# Altium PCB ALTERA256.PcbDoc (part 1 of 4)
Units mil, origin at the board's own origin, x right, y up, seen from the top; angles counter-clockwise.
Board outline 3078.86 x 1897.76 mil, 4 copper layers (TOP, L2_G, L3_P, BOTTOM), stack 34.7 mil thick; 112 components, 168 nets, 693 pads, 318 vias.
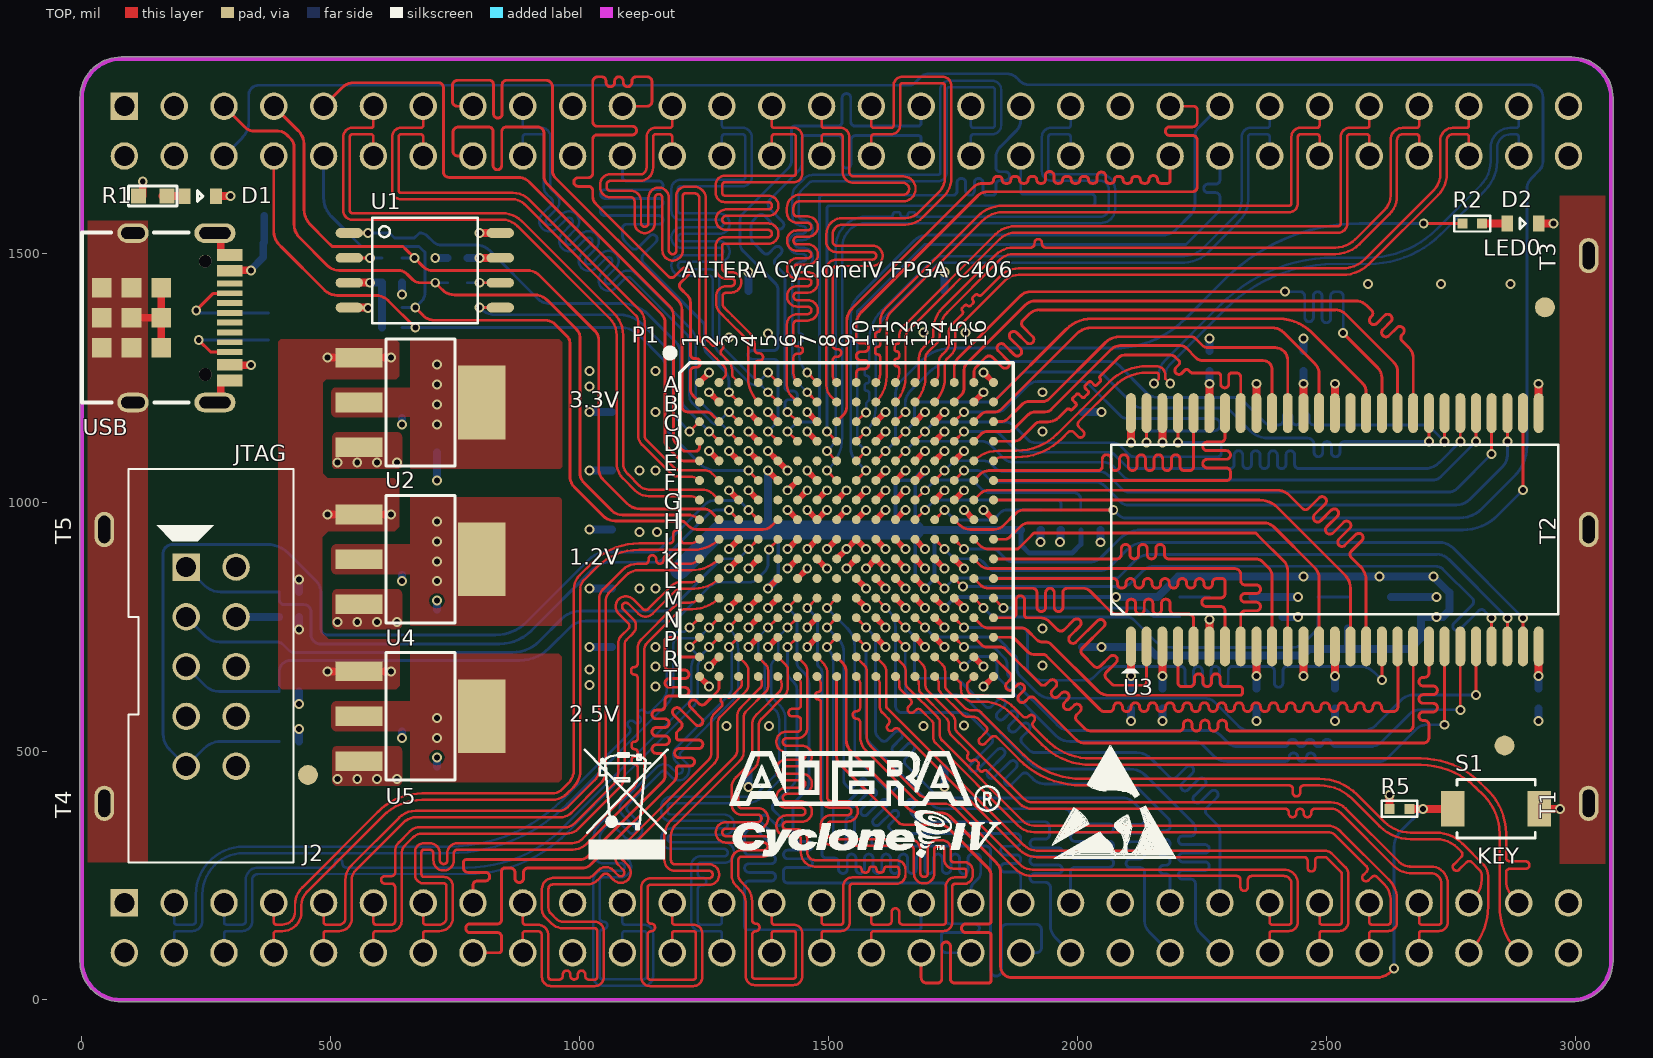
[diagram p0: TOP view]
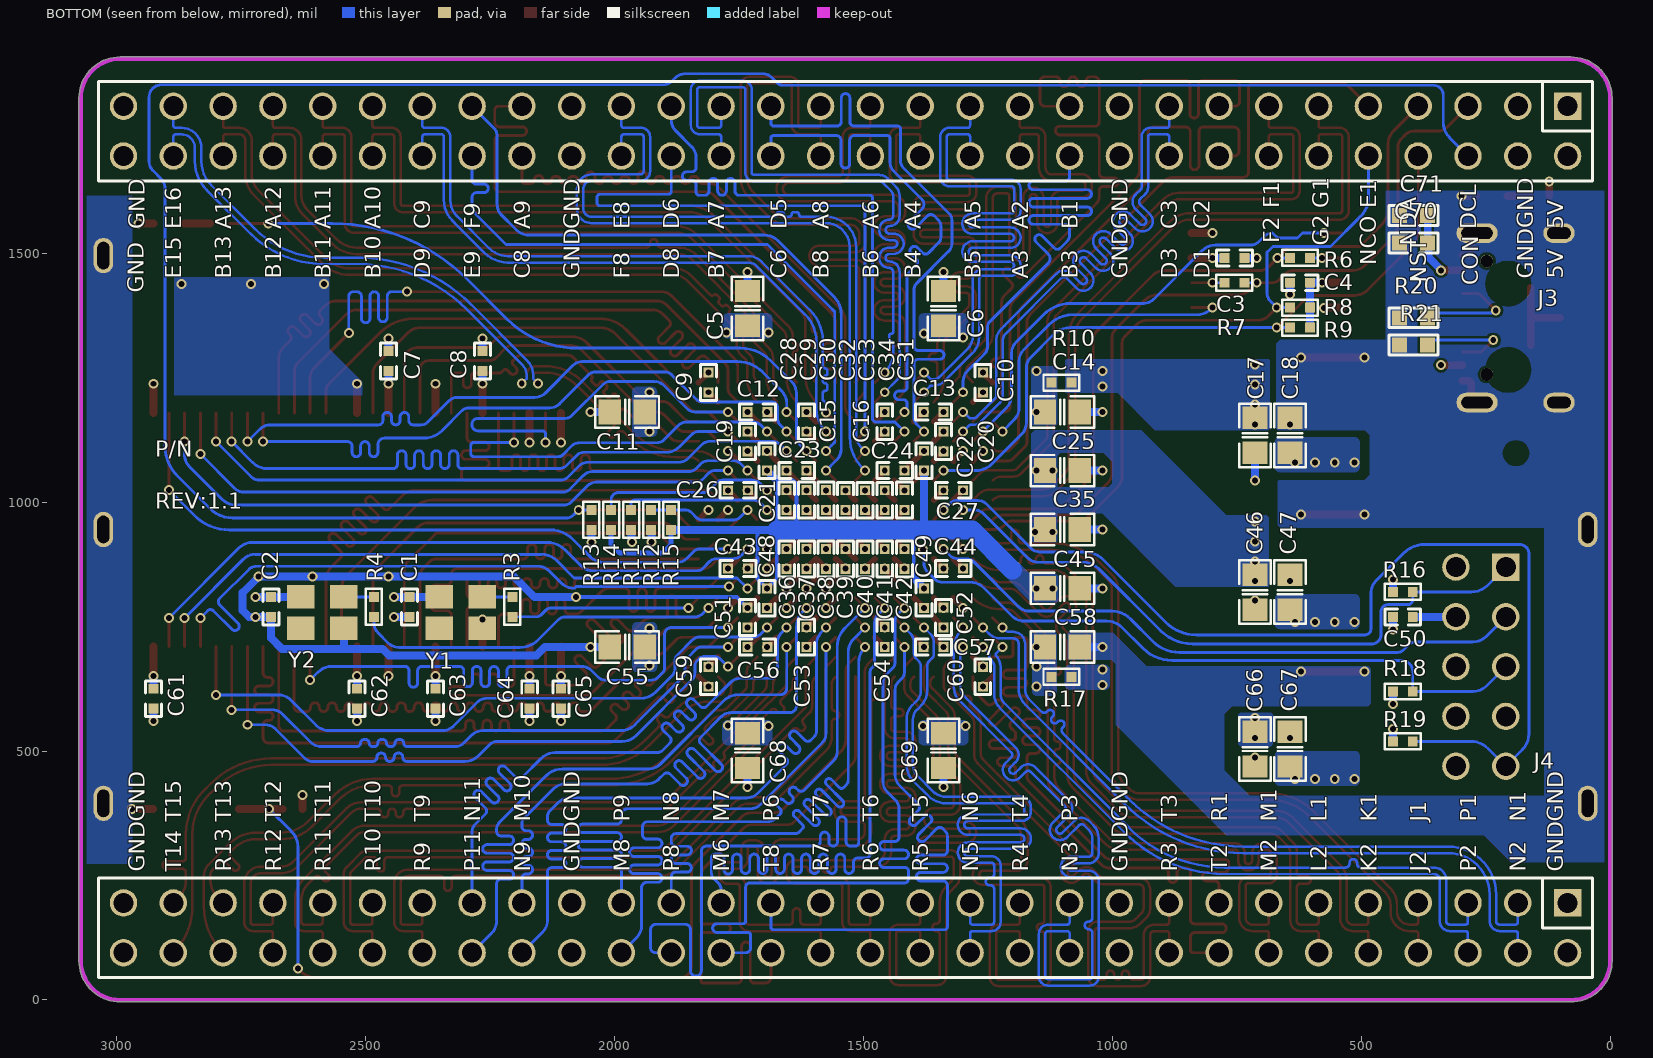
[diagram p1: BOTTOM view, seen from below]
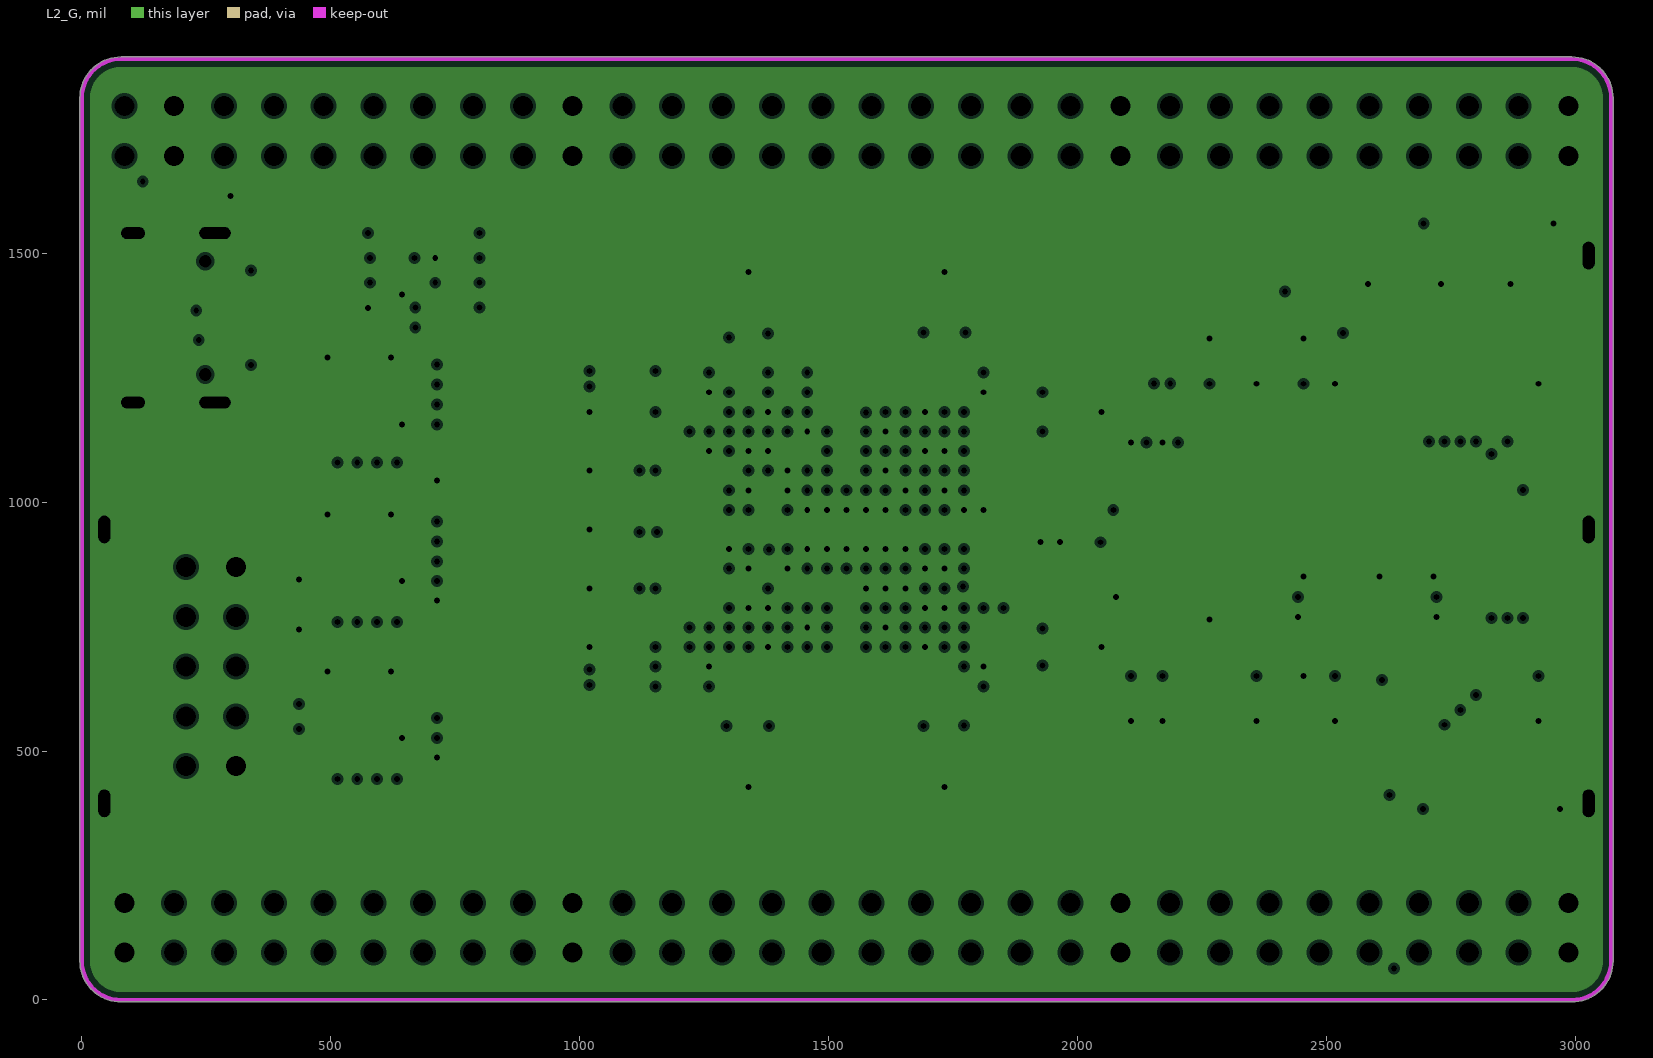
[diagram p2: L2_G, clearances drawn from the general rule]
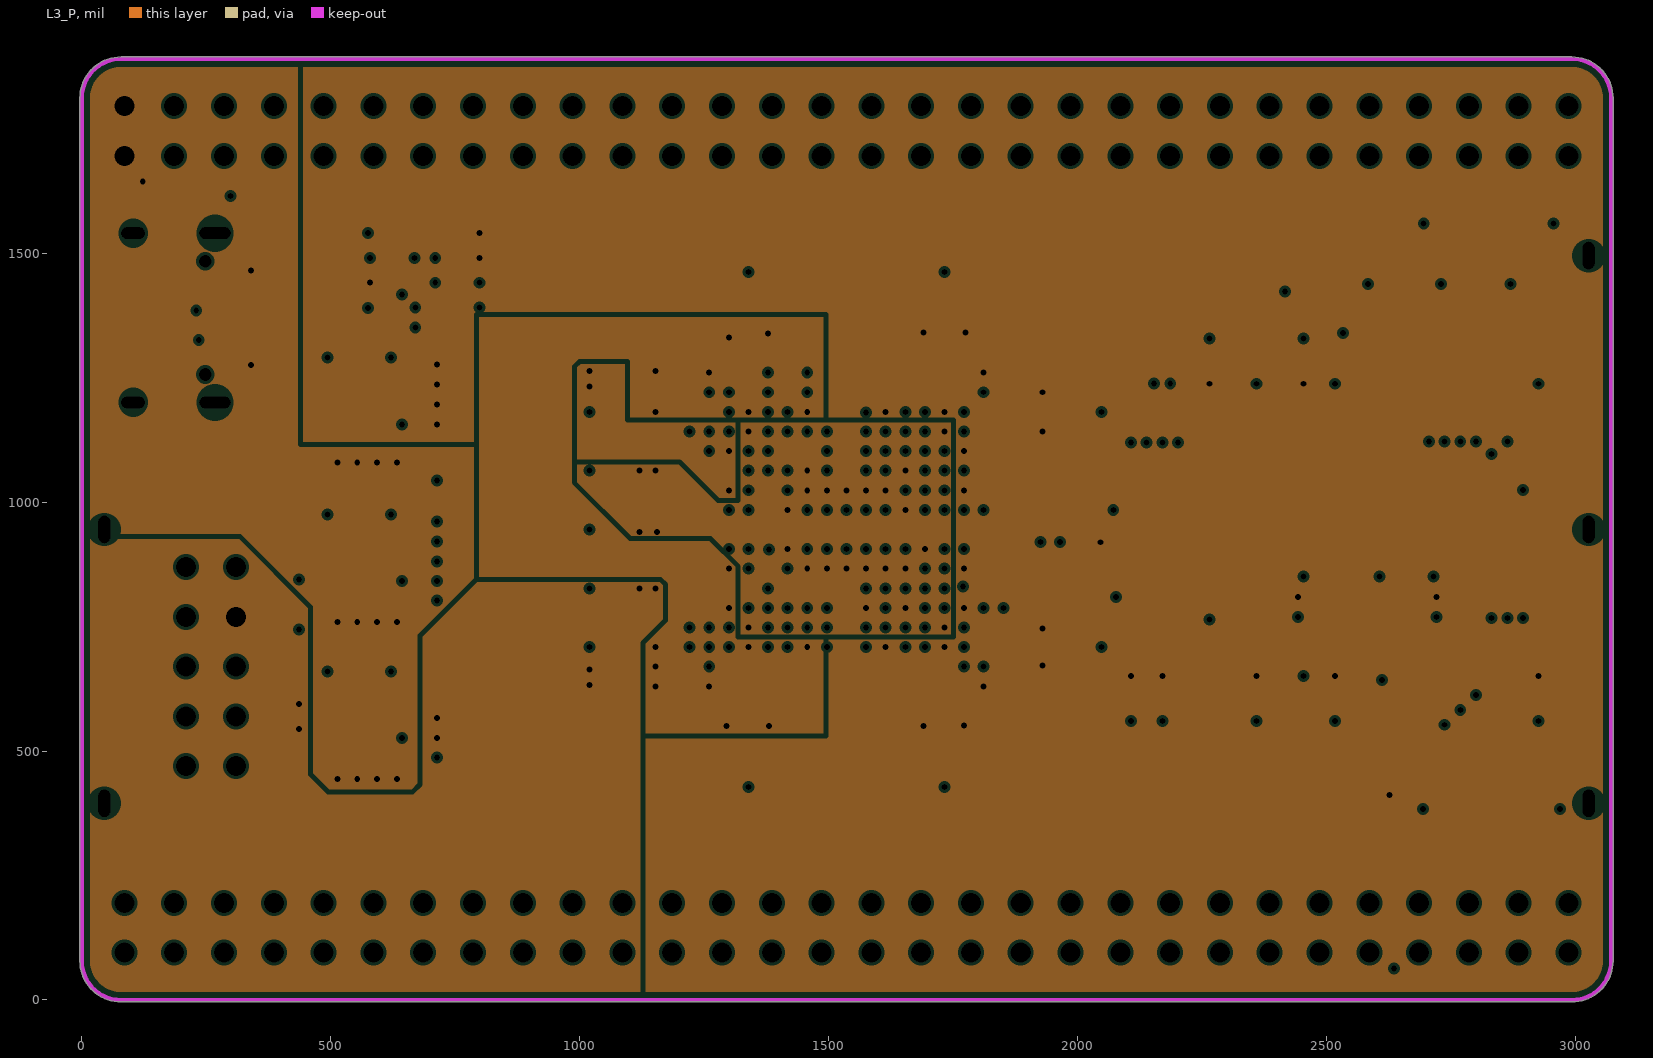
[diagram p3: L3_P, clearances drawn from the general rule]

## Layer stack, top to bottom
Top Solder: solder mask 0.4, Solder Resist, Dk 3.5
TOP: signal copper 1.38
Dielectric1: core 3.94, FR-4, Dk 4.5
L2_G: plane copper 1.4
Dielectric2: prepreg 12.6, FR-4, Dk 4.8
L3_P: plane copper 1.4
Dielectric3: core 12.6, FR-4, Dk 4.8
BOTTOM: signal copper 1.38
Bottom Solder: solder mask 0.4, Solder Resist, Dk 3.5

## Board outline
-3.7,78.74 ccw(c79.04,78.74) 79.04,-4 2992.42,-4 ccw(c2992.42,78.74) 3075.16,78.74 3075.16,1811.02 ccw(c2992.42,1811.02) 2992.42,1893.76 79.04,1893.76 ccw(c79.04,1811.02) -3.7,1811.02

## Design rules (kind name [scope] priority, off if disabled: settings)
Clearance [All] p1: gap=4.8 ignorepadtopadclearanceinfootprint=FALSE except(0: Arc-Hole Track-Hole SMDPad-Hole THPad-Hole Via-Hole Fill-Hole Poly-Hole Region-Hole Text-Hole)
ComponentClearance [All] p1 off: gap=10 collisioncheckmode=3 verticalgap=10 showdistances=FALSE
DiffPairsRouting [All] p1: maxlimit=10 minlimit=5 mostfreqgap=5 toplayer_minwidth=15 toplayer_maxwidth=15 toplayer_prefwidth=15 bottomlayer_minwidth=15 bottomlayer_maxwidth=15 bottomlayer_prefwidth=15 maxuncoupledlength=500
MinimumSolderMaskSliver [All] p1 off: minsoldermaskwidth=10
PlaneClearance [All] p1: clearance=6
PlaneConnect [All] p1: planeconnectstyle=Direct reliefexpansion=20 reliefentries=4 reliefconductorwidth=10 reliefairgap=10
PolygonConnect [All] p1: connectstyle=Direct reliefconductorwidth=10 reliefentries=4 polygonreliefangle="90 Angle" airgapwidth=10
RoutingVias [All] p1: holewidth=12 width=20 viastyle="Through Hole" minholewidth=8 minwidth=16 maxholewidth=160 maxwidth=320
SilkToSilkClearance [All] p1 off: silktosilkclearance=10
SilkToSolderMaskClearance SilkscreenOverComponentPads [IsPad] p1 off: minsilkscreentomaskgap=10 clearancetoexposedcopper=TRUE
SolderMaskExpansion [All] p1: expansion=4 istentingtop=FALSE
Width [All] p1: maxlimit=80 minlimit=4.8 preferedwidth=5
23 further rules are at their usual default settings.

## Classes and differential pairs
component class "PAGE03 FPGA IO": R8 R9 R13
component class "PAGE04 FPGA CLOCK": C1 C2 R3 R4 Y1 Y2
component class "PAGE05 FPGA Config": C3 C4 C50 D2 J2 R2 R5 R6 R7 R11 R12 R14 R15 R16 R18 R19 S1 U1
component class "PAGE06 FPGA Power": C5 C6 C9 C10 C11 C12 C13 C14 C15 C16 C19 C20 C21 C22 C23 C24 C25 C26 C27 C28 C29 C30 C31 C32 C33 C34 C35 C36 C37 C38 C39 C40 C41 C42 C43 C44 C45 C48 C49 C51 C52 C53 C54 C55 C56 C57 C58 C59 C60 C68 C69 P1 R10 R17
component class "PAGE07 SDRAM": C7 C8 C61 C62 C63 C64 C65 U3
component class "PAGE08 System Power": C17 C18 C46 C47 C66 C67 C70 C71 D1 R1 R20 R21 U2 U4 U5 USB
component class "PAGE09 Connectors": J3 J4 T1 T2 T3 T4 T5
net class SDRAM_A[12..0]: SDRAM_A0 SDRAM_A1 SDRAM_A2 SDRAM_A3 SDRAM_A4 SDRAM_A5 SDRAM_A6 SDRAM_A7 SDRAM_A8 SDRAM_A9 SDRAM_A10 SDRAM_A11 SDRAM_A12
net class SDRAM_DQ[15..0]: SDRAM_DQ0 SDRAM_DQ1 SDRAM_DQ2 SDRAM_DQ3 SDRAM_DQ4 SDRAM_DQ5 SDRAM_DQ6 SDRAM_DQ7 SDRAM_DQ8 SDRAM_DQ9 SDRAM_DQ10 SDRAM_DQ11 SDRAM_DQ12 SDRAM_DQ13 SDRAM_DQ14 SDRAM_DQ15

## Components (designator, comment, footprint, x,y, rotation, side; value= is the part's Value field where it differs from the comment)
C1 "100nF" C0402 2411.61,789.5 r90 bottom locked
C2 "100nF" C0402 2689.61,789.5 r90 bottom locked
C3 "100nF" C0402 754.95,1490.39 r0 bottom locked
C4 "100nF" C0402 623,1440.39 r180 bottom locked
C5 "10uF" C0805 1732.59,1388.83 r270 bottom locked
C6 "10uF" C0805 1338.89,1388.83 r270 bottom locked
C7 "100nF" C0402 2453.43,1283.54 r270 bottom locked
C8 "100nF" C0402 2264.45,1283.54 r270 bottom locked
C9 "100nF" C0402 1811.34,1240 r90 bottom locked
C10 "100nF" C0402 1260.14,1240 r90 bottom locked
C11 "10uF" C0805 1974.15,1181.09 r180 bottom locked
C12 "100nF" C0402 1712.59,1181.09 r0 bottom locked
C13 "100nF" C0402 1358.89,1181.09 r180 bottom locked
C14 "10uF" C0805 1100.3,1181.09 r0 bottom locked
C15 "100nF" C0402 1614.48,1161.09 r90 bottom locked
C16 "100nF" C0402 1457,1161.09 r90 bottom locked
C17 "22uF/6.3V" C0805 713.3,1133.99 r90 bottom locked
C18 "10uF/10V" C0805 643.3,1133.99 r270 bottom locked
C19 "100nF" C0402 1732.59,1121.72 r90 bottom locked
C20 "100nF" C0402 1338.89,1121.72 r90 bottom locked
C21 "100nF" C0402 1693.22,1082.98 r270 bottom locked
C22 "100nF" C0402 1378.26,1082.98 r270 bottom locked
C23 "100nF" C0402 1633.85,1062.98 r0 bottom locked
C24 "100nF" C0402 1437,1062.98 r0 bottom locked
C25 "10uF" C0805 1100.3,1062.98 r0 bottom locked
C26 "100nF" C0402 1751.96,1023.61 r0 bottom locked
C27 "100nF" C0402 1319.52,1023.61 r180 bottom locked
C28 "100nF" C0402 1653.85,1004.24 r270 bottom locked
C29 "100nF" C0402 1614.48,1004.24 r90 bottom locked
C30 "100nF" C0402 1575.11,1004.24 r90 bottom locked
C31 "100nF" C0402 1417.63,1004.24 r270 bottom locked
C32 "100nF" C0402 1535.73,1003.61 r90 bottom locked
C33 "100nF" C0402 1496.37,1003.61 r90 bottom locked
C34 "100nF" C0402 1457,1003.61 r90 bottom locked
C35 "10uF" C0805 1100.3,944.86 r0 bottom locked
C36 "100nF" C0402 1653.85,885.5 r270 bottom locked
C37 "100nF" C0402 1614.48,885.5 r270 bottom locked
C38 "100nF" C0402 1575.11,885.5 r270 bottom locked
C39 "100nF" C0402 1535.73,885.5 r270 bottom locked
C40 "100nF" C0402 1496.37,885.5 r270 bottom locked
C41 "100nF" C0402 1457,885.5 r270 bottom locked
C42 "100nF" C0402 1417.63,885.5 r90 bottom locked
C43 "100nF" C0402 1751.96,866.13 r0 bottom locked
C44 "100nF" C0402 1319.52,866.13 r180 bottom locked
C45 "10uF" C0805 1100.3,826.76 r0 bottom locked
C46 "22uF/6.3V" C0805 713.3,818.99 r90 bottom locked
C47 "10uF/10V" C0805 643.3,818.99 r270 bottom locked
C48 "100nF" C0402 1693.22,806.76 r90 bottom locked
C49 "100nF" C0402 1378.26,806.76 r90 bottom locked
C50 "100nF" C0402 416.7,769.45 r180 bottom locked
C51 "100nF" C0402 1732.59,768.02 r270 bottom locked
C52 "100nF" C0402 1338.89,768.02 r270 bottom locked
C53 "100nF" C0402 1614.48,728.65 r270 bottom locked
C54 "100nF" C0402 1457,728.65 r270 bottom locked
C55 "10uF" C0805 1974.15,708.65 r180 bottom locked
C56 "100nF" C0402 1712.59,708.65 r0 bottom locked
C57 "100nF" C0402 1358.89,708.65 r180 bottom locked
C58 "10uF" C0805 1100.3,708.65 r0 bottom locked
C59 "100nF" C0402 1811.33,649 r270 bottom locked
C60 "100nF" C0402 1260.15,649 r270 bottom locked
C61 "100nF" C0402 2925.87,605.04 r90 bottom locked
C62 "100nF" C0402 2516.42,605.04 r90 bottom locked
C63 "100nF" C0402 2358.94,605.04 r90 bottom locked
C64 "100nF" C0402 2169.96,605.04 r90 bottom locked
C65 "100nF" C0402 2106.97,605.04 r90 bottom locked
C66 "22uF/6.3V" C0805 713.3,503.99 r90 bottom locked
C67 "10uF/10V" C0805 643.3,503.99 r270 bottom locked
C68 "10uF" C0805 1732.59,500.91 r90 bottom locked
C69 "10uF" C0805 1338.89,500.91 r90 bottom locked
C70 "104" "C 0603" 395,1520 r0 bottom
C71 "10uF" "C 0603" 395,1575 r0 bottom
D1 "GREEN" Q0603 238.13,1614.28 r0 top locked
D2 "GREEN" Q0603 2894.37,1559.28 r0 top locked
J2 "CONN RCPT 5x2/SM" DIP10-2P54-I 261.07,670.63 r270 top locked
J3 "CONN PLUG 30x2" DIP2X30_2P54 1534.73,1744.88 r180 bottom locked
J4 "CONN PLUG 30x2" DIP2X30_2P54 1534.73,144.88 r180 bottom locked
P1 "EP4CE22F256" fbga256_opt1 1537.82,945.46 r0 top locked
R1 "680R" "R 0603" 142.6,1614.23 r0 top locked
R2 "1K" R0402#1 2792.37,1559.33 r180 top locked
R3 "33R" R0402#2 2204.94,789.55 r270 bottom locked
R4 "33R" R0402#2 2482.94,789.55 r270 bottom locked
R5 "1K" R0402#1 2646.33,383.94 r0 top locked
R6 "33R" R0402#2 622.95,1490.34 r0 bottom locked
R7 "33R" R0402#2 754.9,1440.34 r0 bottom locked
R8 "10K" R0402#2 622.95,1390.34 r0 bottom locked
R9 "10K" R0402#2 622.95,1350.34 r0 bottom locked
R10 "0R" R0402#2 1102.15,1239.73 r0 bottom locked
R11 "1K" R0402#2 1966.25,964.29 r270 bottom locked
R12 "1K/NC" R0402#2 1926.25,964.29 r270 bottom locked
R13 "10K" R0402#2 2046.35,964.19 r90 bottom locked
R14 "1K" R0402#2 2006.35,964.19 r90 bottom locked
R15 "1K" R0402#2 1886.35,964.19 r90 bottom locked
R16 "1K" R0402#2 416.75,819.5 r180 bottom locked
R17 "0R/NC" R0402#2 1102.15,648.99 r0 bottom locked
R18 "1K" R0402#2 416.65,619.4 r0 bottom locked
R19 "1K" R0402#2 416.65,519.4 r0 bottom locked
R20 "5.1K" "R 0603" 395,1370 r0 bottom
R21 "5.1K" "R 0603" 395,1315 r0 bottom
S1 "FSMRA2JH" SMD_3X4X2MM 2840.28,383.99 r0 top locked
T1 "TPAD_015" TP_OBL1_4X0_6 3026.16,394.88 r90 top locked
T2 "TPAD_015" TP_OBL1_4X0_6 3026.16,944.88 r90 top locked
T3 "TPAD_015" TP_OBL1_4X0_6 3026.16,1494.88 r90 top locked
T4 "TPAD_015" TP_OBL1_4X0_6 45.3,394.88 r90 top locked
T5 "TPAD_015" TP_OBL1_4X0_6 45.3,944.88 r90 top locked
U1 "W25Q16FVSIG" SOIC8_1P27_208MIL 688.95,1465.39 r0 top locked
U2 "AMS1117-3.3" SOT-223 680.3,1199.86 r270 top locked
U3 "H57V2562GTR-75C" TSOP54-400 2516.42,938.78 r0 top
U4 "AMS1117-1.2" SOT-223 680.3,884.86 r270 top locked
U5 "AMS1117-2.5" SOT-223 680.3,569.86 r270 top locked
USB "USB TypeC" USB2.0-TYPE-C-16P 296.95,1495.98 r270 top (schematic designator USB1)
Y1 "50MHz" OSC3225 2308.3,772.78 r0 bottom locked
Y2 "TBD" OSC3225 2586.3,772.78 r0 bottom locked

## Footprints (in the part's own frame and the unit in brackets; to place one, negate y for a bottom-side part, rotate by r counter-clockwise, add the part's x,y. Pads: shape width x height; smd on the part's side, far side on the other; paste and mask are expansions set on the pad)
C0402 [mil] "C0402"
  rect 20x20 smd: 1(20,0) 2(-20,0)
  silkscreen extent -36,-16 36,16
C0805 [mil] "C0805"
  rect 44.9x50 smd: 1(35,0) 2(-35,0)
  silkscreen extent -64,-32 64,32
"C 0603" [mil]
  rect 30x30 smd mask+2: 1(-28.25,0) 2(28.25,0)
  silkscreen extent -49,-20 49,20
DIP2X30_2P54 [mil] "DIP2X30_2P54"
  rect 55.1x55.1 hole 40.2: 1(1449,50)
  round 55.1 hole 40.2: 2(1449,-50) 3(1349,50) 4(1349,-50) 5(1249,50) 6(1249,-50) 7(1149,50) 8(1149,-50) 9(1049,50) 10(1049,-50) 11(949,50) 12(949,-50) 13(849,50) 14(849,-50) 15(749,50) 16(749,-50) 17(649,50) 18(649,-50) 19(549,50) 20(549,-50) 21(449,50) 22(449,-50) 23(349,50) 24(349,-50) 25(249,50) 26(249,-50) 27(149,50) 28(149,-50) 29(49,50) 30(49,-50) 31(-51,50) 32(-51,-50) 33(-151,50) 34(-151,-50) 35(-251,50) 36(-251,-50) 37(-351,50) 38(-351,-50) 39(-451,50) 40(-451,-50) 41(-551,50) 42(-551,-50) 43(-651,50) 44(-651,-50) 45(-751,50) 46(-751,-50) 47(-851,50) 48(-851,-50) 49(-951,50) 50(-951,-50) 51(-1051,50) 52(-1051,-50) 53(-1151,50) 54(-1151,-50) 55(-1251,50) 56(-1251,-50) 57(-1351,50) 58(-1351,-50) 59(-1451,50) 60(-1451,-50)
  silkscreen extent -1501,-100 1499,100
DIP10-2P54-I [mil] "DIP10-2P54-I"
  rect 55.1x55.1 hole 40.2: 1(-198.82,-51.18)
  round 55.1 hole 40.2: 2(-198.82,48.82) 3(-98.82,-51.18) 4(-98.82,48.82) 5(1.18,-51.18) 6(1.18,48.82) 7(101.18,-51.18) 8(101.18,48.82) 9(201.18,-51.18) 10(201.18,48.82)
  silkscreen extent -396,-167 394,165
fbga256_opt1 [mil] "FBGA256_OPT1"
  round 18 smd: A1(-297.36,294.69) A2(-257.99,294.69) A3(-218.62,294.69) A4(-179.25,294.69) A5(-139.88,294.69) A6(-100.51,294.69) A7(-61.14,294.69) A8(-21.77,294.69) A9(17.61,294.69) A10(56.98,294.69) A11(96.35,294.69) A12(135.72,294.69) A13(175.09,294.69) A14(214.46,294.69) A15(253.83,294.69) A16(293.2,294.69) B1(-297.36,255.32) B2(-257.99,255.32) B3(-218.62,255.32) B4(-179.25,255.32) B5(-139.88,255.32) B6(-100.51,255.32) B7(-61.14,255.32) B8(-21.77,255.32) B9(17.61,255.32) B10(56.98,255.32) B11(96.35,255.32) B12(135.72,255.32) B13(175.09,255.32) B14(214.46,255.32) B15(253.83,255.32) B16(293.2,255.32) C1(-297.36,215.95) C2(-257.99,215.95) C3(-218.62,215.95) C4(-179.25,215.95) C5(-139.88,215.95) C6(-100.51,215.95) C7(-61.14,215.95) C8(-21.77,215.95) C9(17.61,215.95) C10(56.98,215.95) C11(96.35,215.95) C12(135.72,215.95) C13(175.09,215.95) C14(214.46,215.95) C15(253.83,215.95) C16(293.2,215.95) D1(-297.36,176.58) D2(-257.99,176.58) D3(-218.62,176.58) D4(-179.25,176.58) D5(-139.88,176.58) D6(-100.51,176.58) D7(-61.14,176.58) D8(-21.77,176.58) D9(17.61,176.58) D10(56.98,176.58) D11(96.35,176.58) D12(135.72,176.58) D13(175.09,176.58) D14(214.46,176.58) D15(253.83,176.58) D16(293.2,176.58) E1(-297.36,137.21) E2(-257.99,137.21) E3(-218.62,137.21) E4(-179.25,137.21) E5(-139.88,137.21) E6(-100.51,137.21) E7(-61.14,137.21) E8(-21.77,137.21) E9(17.61,137.21) E10(56.98,137.21) E11(96.35,137.21) E12(135.72,137.21) E13(175.09,137.21) E14(214.46,137.21) E15(253.83,137.21) E16(293.2,137.21) F1(-297.36,97.84) F2(-257.99,97.84) F3(-218.62,97.84) F4(-179.25,97.84) F5(-139.88,97.84) F6(-100.51,97.84) F7(-61.14,97.84) F8(-21.77,97.84) F9(17.61,97.84) F10(56.98,97.84) F11(96.35,97.84) F12(135.72,97.84) F13(175.09,97.84) F14(214.46,97.84) F15(253.83,97.84) F16(293.2,97.84) G1(-297.36,58.47) G2(-257.99,58.47) G3(-218.62,58.47) G4(-179.25,58.47) G5(-139.88,58.47) G6(-100.51,58.47) G7(-61.14,58.47) G8(-21.77,58.47) G9(17.61,58.47) G10(56.98,58.47) G11(96.35,58.47) G12(135.72,58.47) G13(175.09,58.47) G14(214.46,58.47) G15(253.83,58.47) G16(293.2,58.47) H1(-297.36,19.1) H2(-257.99,19.1) H3(-218.62,19.1) H4(-179.25,19.1) H5(-139.88,19.1) H6(-100.51,19.1) H7(-61.14,19.1) H8(-21.77,19.1) H9(17.61,19.1) H10(56.98,19.1) H11(96.35,19.1) H12(135.72,19.1) H13(175.09,19.1) H14(214.46,19.1) H15(253.83,19.1) H16(293.2,19.1) J1(-297.36,-20.28) J2(-257.99,-20.28) J3(-218.62,-20.28) J4(-179.25,-20.28) J5(-139.88,-20.28) J6(-100.51,-20.28) J7(-61.14,-20.28) J8(-21.77,-20.28) J9(17.61,-20.28) J10(56.98,-20.28) J11(96.35,-20.28) J12(135.72,-20.28) J13(175.09,-20.28) J14(214.46,-20.28) J15(253.83,-20.28) J16(293.2,-20.28) K1(-297.36,-59.65) K2(-257.99,-59.65) K3(-218.62,-59.65) K4(-179.25,-59.65) K5(-139.88,-59.65) K6(-100.51,-59.65) K7(-61.14,-59.65) K8(-21.77,-59.65) K9(17.61,-59.65) K10(56.98,-59.65) K11(96.35,-59.65) K12(135.72,-59.65) K13(175.09,-59.65) K14(214.46,-59.65) K15(253.83,-59.65) K16(293.2,-59.65) L1(-297.36,-99.02) L2(-257.99,-99.02) L3(-218.62,-99.02) L4(-179.25,-99.02) L5(-139.88,-99.02) L6(-100.51,-99.02) L7(-61.14,-99.02) L8(-21.77,-99.02) L9(17.61,-99.02) L10(56.98,-99.02) L11(96.35,-99.02) L12(135.72,-99.02) L13(175.09,-99.02) L14(214.46,-99.02) L15(253.83,-99.02) L16(293.2,-99.02) M1(-297.36,-138.39) M2(-257.99,-138.39) M3(-218.62,-138.39) M4(-179.25,-138.39) M5(-139.88,-138.39) M6(-100.51,-138.39) M7(-61.14,-138.39) M8(-21.77,-138.39) M9(17.61,-138.39) M10(56.98,-138.39) M11(96.35,-138.39) M12(135.72,-138.39) M13(175.09,-138.39) M14(214.46,-138.39) M15(253.83,-138.39) M16(293.2,-138.39) N1(-297.36,-177.76) N2(-257.99,-177.76) N3(-218.62,-177.76) N4(-179.25,-177.76) N5(-139.88,-177.76) N6(-100.51,-177.76) N7(-61.14,-177.76) N8(-21.77,-177.76) N9(17.61,-177.76) N10(56.98,-177.76) N11(96.35,-177.76) N12(135.72,-177.76) N13(175.09,-177.76) N14(214.46,-177.76) N15(253.83,-177.76) N16(293.2,-177.76) P1(-297.36,-217.13) P2(-257.99,-217.13) P3(-218.62,-217.13) P4(-179.25,-217.13) P5(-139.88,-217.13) P6(-100.51,-217.13) P7(-61.14,-217.13) P8(-21.77,-217.13) P9(17.61,-217.13) P10(56.98,-217.13) P11(96.35,-217.13) P12(135.72,-217.13) P13(175.09,-217.13) P14(214.46,-217.13) P15(253.83,-217.13) P16(293.2,-217.13) R1(-297.36,-256.5) R2(-257.99,-256.5) R3(-218.62,-256.5) R4(-179.25,-256.5) R5(-139.88,-256.5) R6(-100.51,-256.5) R7(-61.14,-256.5) R8(-21.77,-256.5) R9(17.61,-256.5) R10(56.98,-256.5) R11(96.35,-256.5) R12(135.72,-256.5) R13(175.09,-256.5) R14(214.46,-256.5) R15(253.83,-256.5) R16(293.2,-256.5) T1(-297.36,-295.87) T2(-257.99,-295.87) T3(-218.62,-295.87) T4(-179.25,-295.87) T5(-139.88,-295.87) T6(-100.51,-295.87) T7(-61.14,-295.87) T8(-21.77,-295.87) T9(17.61,-295.87) T10(56.98,-295.87) T11(96.35,-295.87) T12(135.72,-295.87) T13(175.09,-295.87) T14(214.46,-295.87) T15(253.83,-295.87) T16(293.2,-295.87)
  silkscreen extent -364,-335 333,361
OSC3225 [mil] "OSC3225"
  rect 55.12x47.24 smd: 1(43.31,26.28) 2(-43.31,26.28) 3(-43.31,-36.72) 4(43.31,-36.72)
  silkscreen extent 31,54 59,62
Q0603 [mil] "Q0603"
  rect 23.62x31.5 smd: 1(-31.5,0) 2(31.5,0)
  silkscreen extent -6,-11 5,11
R0402#1 [mil] "R0402"
  rect 20x20 smd: 1(-20.05,0.05) 2(19.95,0.05)
  silkscreen extent -36,-16 36,16
R0402#2 [mil] "R0402"
  rect 20x20 smd: 1(20.05,-0.05) 2(-19.95,-0.05)
  silkscreen extent -36,-16 36,16
"R 0603" [mil]
  rect 30x30 smd mask+2: 1(-28.25,0) 2(28.25,0)
  silkscreen extent -49,-20 49,20
SMD_3X4X2MM [mil] "SMD_3X4X2MM"
  rect 47.24x70.87 smd: 1(-86.61,0) 2(86.61,0)
  silkscreen extent -79,-59 79,59
SOIC8_1P27_208MIL [mil] "SOIC8_1P27_208MIL"
  oval 55.12x19.68 smd: 1(-151.57,75) 2(-151.57,25) 3(-151.57,-25) 4(-151.57,-75) 5(151.57,-75) 6(151.57,-25) 7(151.57,25) 8(151.57,75)
  silkscreen extent -106,-106 106,106
SOT-223 [mm] "SOT-223"
  rect 1x2.4 smd: 1(-2.29,-3.125) 2(0,-3.125) 3(2.29,-3.125)
  rect 3.75x2.4 smd: 4(0,3.125)
  silkscreen extent -3.25,-1.75 3.25,1.75
TP_OBL1_4X0_6 [mil] "TP_OBL1_4X0_6"
  oval 70.87x39.37 hole 24 slot 55 at 0 deg: 1(0,0)
TSOP54-400 [mil] "TSOP54-400"
  oval 20x80 smd: 1(-409.45,-228.74) 2(-377.95,-228.74) 3(-346.46,-228.74) 4(-314.96,-228.74) 5(-283.47,-228.74) 6(-251.97,-228.74) 7(-220.47,-228.74) 8(-188.98,-228.74) 9(-157.48,-228.74) 10(-125.99,-228.74) 11(-94.49,-228.74) 12(-62.99,-228.74) 13(-31.5,-228.74) 14(0,-228.74) 15(31.49,-228.74) 16(62.99,-228.74) 17(94.49,-228.74) 18(125.98,-228.74) 19(157.48,-228.74) 20(188.98,-228.74) 21(220.47,-228.74) 22(251.97,-228.74) 23(283.46,-228.74) 24(314.96,-228.74) 25(346.46,-228.74) 26(377.95,-228.74) 27(409.45,-228.74) 28(409.45,239.76) 29(377.95,239.76) 30(346.46,239.76) 31(314.96,239.76) 32(283.46,239.76) 33(251.97,239.76) 34(220.47,239.76) 35(188.98,239.76) 36(157.48,239.76) 37(125.98,239.76) 38(94.49,239.76) 39(62.99,239.76) 40(31.49,239.76) 41(0,239.76) 42(-31.5,239.76) 43(-62.99,239.76) 44(-94.49,239.76) 45(-125.99,239.76) 46(-157.48,239.76) 47(-188.98,239.76) 48(-220.47,239.76) 49(-251.97,239.76) 50(-283.47,239.76) 51(-314.96,239.76) 52(-346.46,239.76) 53(-377.95,239.76) 54(-409.45,239.76)
  silkscreen extent -449,-282 449,176
USB2.0-TYPE-C-16P [mm]
  rect 0.6x1.3 smd mask+0.064: 1(0,0) 2(0.8,0) 11(5.6,0) 12(6.4,0)
  rect 0.3x1.3 smd mask+0.064: 3(1.45,0) 4(1.95,0) 5(2.45,0) 6(2.95,0) 7(3.45,0) 8(3.95,0) 9(4.45,0) 10(4.95,0)
  oval 1x2.1 hole 0.6 slot 1.6 at 90 deg: SH1(-1.12,-0.745) SH3(7.52,-0.745)
  oval 1x1.6 hole 0.6 slot 1.2 at 90 deg: SH2(-1.12,-4.925) SH4(7.52,-4.925)
  rect 1x1 smd mask+0: SH2(1.676,-3.478) SH2(1.676,-6.526) SH2(1.676,-5.002) SH2(3.2,-3.478) SH2(3.2,-6.526) SH2(3.2,-5.002) SH2(4.724,-6.526)
  rect 1x1 smd paste+0 mask+0: SH2(4.724,-5.002) SH2(4.724,-3.478)
  round 0.65 hole 0.65 unplated mask+0: ""(0.31,-1.245) ""(6.09,-1.245)
  silkscreen extent -1.14,-7.53 7.52,-2.09

## Part data
C1 C2 C3 C4 C50: library part CAP_0, "CAP CER .1UF 16V X7R 0402", DIELECTRIC=X7R, Manufacturer=MURATA, MANUFACTURER P/N=GRM155R71C104KA88D, DISTRIBUTOR=DIGIKEY, DISTRIBUTOR P/N=490-3261-1-ND, PRICE=0.00300, ROOM=PHY&FPGA
C5 C6 C11 C14 C17 C25 C35 C45 C46 C55 C58 C66 C68 C69: library part CAP_NP, "Capacitor, 10u, 0805, X6S, 10%, 10V", Tolerance=10%, AGILE_PN=150-75429, CAD_APPROVED=Yes, FPLIST=CC0201,CC0201_HD,CC0201_3PIN,0201_CC, HEIGHT=0.33MM, MFG_NAME01=MURATA, MFG_PN01=GRM31CR71A106KA01L, RoHS=Yes
C7 C8 C9 C10 C12 C13 C15 C16 C19 C20 C21 C22 C23 C24 C26 C27 C28 C29 C30 C31 C32 C33 C34 C36 C37 C38 C39 C40 C41 C42 C43 C44 C48 C49 C51 C52 C53 C54 C56 C57 C59 C60 C61 C62 C63 C64 C65: library part CAP_NP, "CAP CER 0.1UF 6.3V 10% X5R 0201", Tolerance=10%, AGILE_PN=150-75429, CAD_APPROVED=Yes, FPLIST=CC0201,CC0201_HD,CC0201_3PIN,0201_CC, HEIGHT=0.33MM, MFG_NAME01=MURATA, MFG_PN01=GRM033R60J104KE19D, RoHS=Yes
C18 C47 C67: library part CAP_NP, "CAP CER 22UF 16V 10%", Tolerance=10%, AGILE_PN=150-75429, CAD_APPROVED=Yes, FPLIST=CC0201,CC0201_HD,CC0201_3PIN,0201_CC, HEIGHT=0.33MM, MFG_NAME01=Murata, MFG_PN01=GRM033R60J104KE19D, RoHS=Yes
C70 C71: library part C-0603-SMD
D1 D2: library part LED, ROOM=POWER
J2: library part "CONN RCPT 5x2/SM_0"
R1 R2 R3 R4 R5 R6 R7 R8 R9 R10 R11 R12 R13 R14 R15 R17: library part "SMALL R1"
R16 R18 R19: library part R_6
R20 R21: library part R, "电阻", BOM名称=贴片电阻, Parameter=电阻, 学习资源=www.openedv.com, 版权归属=正点原子
S1: library part SWITCH_2, "SWITCH TACT RA H=3.86MM 160GF", Manufacturer=TYCO, MANUFACTURER P/N=FSMRA2JH, ROOM=CPU
T1 T2 T3 T4 T5: library part TESTLOOP, "TEST POINT PAD 15MIL DIA SMT, NO PART TO ORDER", AGILE_PN=211-76645, ASSY_OPT=DNP, CAD_APPROVED=Yes, CLASS=IO, HEIGHT=0.1MM, MFG_NAME01=NOTACOMPONENT, MFG_PN01=NOTACOMPONENT, RoHS=Yes
U1: library part EPCS1SI8N_0
U2 U4 U5: library part AMS1117
U3: library part K4S561632C-TC75_0
USB: library part "USB Type-C", "12P TypeC 母座"
Y1 Y2: library part OSCILLATOR_0, ROOM=PHY&FPGA
P1: SPLIT_INST=TRUE, SWAP_INFO=(S1+S2+S3+S4+S5)

## Free pads (board coordinates)
  round 40 smd: ""(454.3,452) ""(2857.3,511) ""(2938.3,1391)

## Via types
v1: diameter 20, hole 12, TOP to BOTTOM, 314 vias
v2: diameter 20, hole 12, TOP to BOTTOM, tented both sides, 4 vias

## Nets (pads, with @x,y where several pads share a name; then routed paths per layer and width w, separated by ;. In a path a pad name is that pad's centre, name@x,y a point inside that pad or via, vN(x,y) a via of type N, cw(c..) or ccw(c..) an arc to the next point about the centre after c; other vN are vias at no path point)
50MHZ_CLK: P1.M16 R3.1 | length 388.2
  TOP w5.78: P1.M16@1831.02,807.07 v1(1850.7,787.39)
  BOTTOM w5.78: v1(1850.7,787.39) 2127.41,787.39 cw(c2127.41,774.11) 2136.8,783.5 2145.8,774.5 ccw(c2157.87,786.57) 2157.87,769.5 R3.1@2204.99,769.5
+1.2V: C19.1 C20.1 C23.1 C24.1 C25.1 C28.1 C29.1 C30.1 C31.1 C32.1 C33.1 C34.1 C35.1 C36.1 C37.1 C38.1 C39.1 C40.1 C41.1 C42.1 C46.1 C51.1 C52.1 P1.D4 P1.D13 P1.F7 P1.F11 P1.G6 P1.G7 P1.G8 P1.G9 P1.G10 P1.H6 P1.H11 P1.J6 P1.J12 P1.K7 P1.K9 P1.K10 P1.K11 P1.L6 P1.M9 P1.M11 P1.N4 P1.N13 U4.2 U4.4 | length 640.1
  TOP w12: v1(1338.89,748.02) P1.N4@1358.57,767.7 ; v1(1338.89,1141.72) P1.D4@1358.57,1122.04 ; v1(1417.63,905.5) P1.J6@1437.31,925.18 ; v1(1417.63,984.24) P1.H6@1437.31,964.56 ; P1.L6@1437.31,846.44 v1(1456.99,866.12) ; P1.G6@1437.31,1003.93 v1(1456.99,1023.61) ; v1(1457,1062.98) P1.F7@1476.68,1043.3 ; P1.K7@1476.68,885.81 v1(1496.36,866.13) ; P1.G7@1476.68,1003.93 v1(1496.36,1023.61) ; P1.G8@1516.05,1003.93 v1(1535.73,1023.61) ; v1(1535.75,866.13) P1.K9@1555.43,885.81 ; P1.M9@1555.43,807.07 v1(1575.11,787.39) ; P1.G9@1555.43,1003.93 v1(1575.11,1023.61) ; v1(1575.12,866.13) P1.K10@1594.8,885.81 v1(1614.48,866.13) ; P1.G10@1594.8,1003.93 v1(1614.48,1023.61) ; P1.M11@1634.17,807.07 v1(1653.85,787.39) ; P1.K11@1634.17,885.81 v1(1653.85,866.13) ; P1.H11@1634.17,964.56 v1(1653.85,984.24) ; P1.F11@1634.17,1043.3 v1(1653.85,1062.98) ; P1.J12@1673.54,925.18 v1(1693.22,905.5) ; P1.N13@1712.91,767.7 v1(1732.59,748.02) ; P1.D13@1712.91,1122.04 v1(1732.59,1141.72)
  other v1: 713.3,840.99 713.3,880.99 713.3,920.99 1120,940 1155,940 713.3,960.99 1120.3,1062.98 1152.3,1062.98
+2.5V: C21.1 C22.1 C45.1 C48.1 C49.1 C50.1 C66.1 J2.4 P1.F5 P1.F12 P1.L5 P1.L12 R14.2 R15.2 R17.2 R18.1 R19.1 U5.2 U5.4 | length 1921.4
  TOP w12: v1(1378.26,826.76) P1.L5@1397.94,846.44 ; v1(1378.26,1062.98) P1.F5@1397.94,1043.3 ; P1.L12@1673.54,846.44 v1(1693.22,826.76) ; P1.F12@1673.54,1043.3 v1(1693.22,1062.98)
  BOTTOM w7.5: 1396.26,844.76 1398.55,847.05 1398.55,943.99 ; 1634.3,943.99 1634.3,1037.07 1640.84,1043.61 1673.85,1043.61 1673.85,943.99 1673.85,846.13 v1(1693.22,826.76) 1712.59,846.13 1712.59,943.99
  BOTTOM w10: R15.2@1886.3,944.24 1886.3,914 1903.06,897.24 1988.54,897.24 2006.3,915 R14.2@2006.3,944.24
  BOTTOM w16: J2.4@309.89,769.45 C50.1@396.7,769.45 ; R19.1@436.7,519.45 v1(436.7,544.45) ; v1(436.7,594.45) R18.1@436.7,619.45 ; v1(1378.26,826.76) 1396.26,844.76 ; v1(1378.26,1062.98) 1378.26,951.49 1385.76,943.99 ; 1673.85,943.99 1674.1,944.24 1712.59,944.24 R15.2@1886.3,944.24 ; 1673.85,1043.61 v1(1693.22,1062.98)
  BOTTOM w38: 1200.8,863.5 1281.29,943.99 1385.76,943.99 1396.26,943.99 1436.3,943.99 1634.3,943.99 1673.85,943.99
  other v1: 713.3,525.99 713.3,565.99 1019.3,632.33 1019.3,663.33 1120.3,826.76 1152.3,826.76
+3.3V: C1.1 C2.1 C3.1 C4.1 C5.1 C7.1 C8.1 C9.1 C11.1 C12.1 C15.1 C17.1 C26.1 C27.1 C43.1 C53.1 C55.1 C56.1 C59.1 C61.1 C62.1 C63.1 C64.1 C65.1 C68.1 P1.A16 P1.C10 P1.C13 P1.E3 P1.E14 P1.G3 P1.G14 P1.K14 P1.M14 P1.P10 P1.P13 P1.T16 R5.1 R8.2 R9.2 R10.2 R13.2 U1.3 U1.7 U1.8 U2.2 U2.4 U3.1 U3.3 U3.9 U3.14 U3.27 U3.43 U3.49 Y1.4 Y2.4 | length 1426.7
  TOP w12: v1(1299.52,1023.61) P1.G3@1319.2,1003.93 ; v1(1299.52,1102.35) P1.E3@1319.2,1082.67 ; P1.P10@1594.8,728.33 v1(1614.48,708.65) ; P1.C10@1594.8,1161.41 v1(1614.48,1181.09) ; P1.P13@1712.91,728.33 v1(1732.59,708.65) ; P1.C13@1712.91,1161.41 v1(1732.59,1181.09) ; P1.M14@1752.28,807.07 v1(1771.96,787.39) ; P1.K14@1752.28,885.81 v1(1771.96,866.13) ; P1.G14@1752.28,1003.93 v1(1771.96,1023.61) ; P1.E14@1752.28,1082.67 v1(1771.96,1102.35) ; v1(1811.34,629.91) P1.T16@1831.02,649.59 ; v1(1811.34,1259.83) P1.A16@1831.02,1240.15
  TOP w16: U1.3@537.38,1440.39 v1(578.94,1440.39) ; v1(798.96,1490.39) U1.7@840.52,1490.39 ; v1(798.96,1540.39) U1.8@840.52,1540.39 ; v1(2106.97,651.04) U3.1@2106.97,710.04 ; v1(2169.96,651.04) U3.3@2169.96,710.04 ; U3.49@2264.45,1178.54 v1(2264.45,1237.54) ; v1(2358.94,651.04) U3.9@2358.94,710.04 ; U3.43@2453.43,1178.54 v1(2453.43,1237.54) ; v1(2516.42,651.04) U3.14@2516.42,710.04 ; R5.1@2626.28,383.99 v1(2626.28,411.58) ; v1(2925.87,651.04) U3.27@2925.87,710.04
  BOTTOM w16: v1(578.94,1440.39) C4.1@603,1440.39 R8.2@603,1390.39 R9.2@603,1350.39 ; C3.1@774.95,1490.39 v1(798.96,1490.39) ; v1(2046.3,919.24) R13.2@2046.3,944.24 ; C65.1@2106.97,625.04 v1(2106.97,651.04) ; C64.1@2169.96,625.04 v1(2169.96,651.04) ; v1(2264.45,1237.54) C8.1@2264.45,1263.54 ; Y1.4@2351.61,809.5 C1.1@2411.61,809.5 v1(2442.8,809.5) ; C63.1@2358.94,625.04 v1(2358.94,651.04) ; v1(2453.43,1237.54) C7.1@2453.43,1263.54 ; C62.1@2516.42,625.04 v1(2516.42,651.04) ; Y2.4@2629.61,809.5 C2.1@2689.61,809.5 v1(2720.8,809.5) ; C61.1@2925.87,625.04 v1(2925.87,651.04)
  other v1: 1690,550 1771.96,551.17 1929.44,671.73 1929.44,745.73 1929.44,1141.72 713.3,1155.99 713.3,1195.99 1929.44,1220.46 1019.3,1232.33 713.3,1235.99 1019.3,1263.33 713.3,1275.99 1690,1340 1775,1340
+5V: C18.1 C47.1 C67.1 C70.1 C71.1 J3.1 J3.2 R1.1 U2.3 U4.3 U5.3 USB.2 USB.11 | length 232
  TOP w15: USB.11@296.95,1275.51 297.46,1275 v2@335,1275 ; USB.2@296.95,1464.49 297.46,1465 v2(340,1465)
  TOP w16: R1.1@122.55,1614.28 v1(122.55,1643.63)
  BOTTOM w15: v2(340,1465) 340,1466.35 364.93,1491.29 364.93,1519.93 366.75,1521.75 C71.1@366.75,1575
  other v1: 513.3,443.99 553.3,443.99 593.3,443.99 633.3,443.99 513.3,758.99 553.3,758.99 593.3,758.99 633.3,758.99 513.3,1078.99 553.3,1078.99 593.3,1078.99 633.3,1078.99
  other v2: 340,1275
A2_T2N_VREF_B8: J3.23 P1.A2 | length 1266.9
  TOP w5: J3.23@1185.73,1794.88 1185.73,1756.38 cw(c1180.73,1756.38) 1180.73,1751.38 1152.3,1751.38 ccw(c1152.3,1733.38) 1134.3,1733.38 1134.3,1671 cw(c1121.3,1671) 1121.3,1658 1061.3,1658 ccw(c1061.3,1638) 1041.3,1638 1041.3,1632 ccw(c1061.3,1632) 1061.3,1612 1102.63,1612 cw(c1102.63,1604.5) 1110.13,1604.5 1110.13,1560.49 ccw(c1130.63,1560.49) 1151.13,1560.49 1151.13,1610.93 cw(c1158.63,1610.93) 1166.13,1610.93 1166.13,1505.28 ccw(c1186.63,1505.28) 1207.13,1505.28 1207.13,1615 cw(c1212.13,1615) 1212.13,1620 1230.3,1620 cw(c1230.3,1610) 1240.3,1610 1240.3,1335.01 ccw(c1270.23,1334.99) 1248.61,1314.29 ccw(c1270.23,1334.99) 1249.05,1313.84 1275.34,1287.56 1289.59,1273.3 cw(c1281.33,1265.04) 1293.01,1265.04 1293.01,1255.4 cw(c1288.01,1255.4) 1291.55,1251.87 P1.A2@1279.83,1240.15
A3_T2P_B8: J3.24 P1.A3 | length 1267.1
  TOP w5: J3.24@1185.73,1694.88 1185.73,1733.38 ccw(c1180.73,1733.38) 1180.73,1738.38 1152.3,1738.38 ccw(c1152.3,1733.38) 1147.3,1733.38 1147.3,1671 cw(c1121.3,1671) 1121.3,1645 1061.3,1645 ccw(c1061.3,1638) 1054.3,1638 1054.3,1632 ccw(c1061.3,1632) 1061.3,1625 1102.63,1625 cw(c1102.63,1604.5) 1123.13,1604.5 1123.13,1560.49 ccw(c1130.63,1560.49) 1138.13,1560.49 1138.13,1610.93 cw(c1158.63,1610.93) 1179.13,1610.93 1179.13,1505.28 ccw(c1186.63,1505.28) 1194.13,1505.28 1194.13,1615 cw(c1212.13,1615) 1212.13,1633 1230.3,1633 cw(c1230.3,1610) 1253.3,1610 1253.3,1335 ccw(c1270.22,1335) 1258.25,1323.04 1265.93,1315.36 ccw(c1269.93,1319.35) 1273.93,1315.35 1275.92,1317.36 cw(c1281.22,1312.06) 1286.52,1317.36 cw(c1281.22,1312.05) 1286.52,1306.75 1284.54,1304.75 ccw(c1288.54,1300.75) 1284.54,1296.75 1298.79,1282.5 cw(c1281.32,1265.06) 1306.01,1265.03 1306.01,1255.41 ccw(c1311.01,1255.41) 1307.47,1251.88 P1.A3@1319.2,1240.15
A4_T3N_B8: J3.27 P1.A4 | length 1263.5
  TOP w5: 1286.3,1510.98 1286.56,1469.05 ccw(c1294.06,1469.1) 1294.11,1461.6 1304.48,1461.66 cw(c1304.6,1441.45) 1324.81,1441.6 cw(c1303.99,1441.45) 1304.13,1420.63 1294.37,1420.57 ccw(c1294.42,1413.07) 1286.92,1413.02 1286.98,1403.34 1286.98,1399.41 ccw(c1300.71,1399.41) 1291,1389.7 1306.41,1374.29 1342.5,1338.2 cw(c1321.22,1316.94) 1351.3,1316.94 1351.3,1306.03 ccw(c1358.8,1306.03) 1358.8,1298.53 1360.8,1298.53 cw(c1360.8,1291.03) 1360.8,1283.53 1358.8,1283.53 ccw(c1358.8,1276.03) 1351.3,1276.03 1351.3,1252.96 ccw(c1363.37,1252.95) 1353.64,1245.81 1354.85,1244.16 ccw(c1369.58,1255.02) 1356.66,1242.06 P1.A4@1358.57,1240.15 ; 1286.3,1511.02 1286.3,1514.75 cw(c1290.05,1514.75) 1290.05,1518.5 1378.54,1518.5 ccw(c1378.54,1539) 1378.54,1559.5 1293.8,1559.5 cw(c1293.8,1567) 1293.8,1574.5 1378.54,1574.5 ccw(c1378.54,1595) 1378.54,1615.5 1291.3,1615.5 cw(c1291.3,1620.5) 1286.3,1620.5 1286.3,1637 cw(c1291.3,1637) 1291.3,1642 1429.3,1642 ccw(c1429.3,1660) 1447.3,1660 1447.3,1733.38 ccw(c1429.3,1733.38) 1429.3,1751.38 1390.73,1751.38 cw(c1390.73,1756.38) 1385.73,1756.38 J3.27@1385.73,1794.88
A5_T5N_B8: J3.25 P1.A5 | length 1263.2
  TOP w5.78: v1(1378.26,1259.83) P1.A5@1397.94,1240.15
  BOTTOM w5: J3.25@1285.73,1794.88 1285.73,1756.38 ccw(c1290.73,1756.38) 1290.73,1751.38 1327.3,1751.38 cw(c1327.3,1733.38) 1345.3,1733.38 1345.3,1652 cw(c1327.3,1652) 1327.3,1634 1202.3,1634 ccw(c1202.3,1629) 1197.3,1629 1197.3,1584.48 ccw(c1202.3,1584.48) 1202.3,1579.48 1280.8,1579.48 cw(c1280.8,1558.98) 1280.8,1538.48 1204.8,1538.48 ccw(c1204.8,1530.98) 1204.8,1523.48 1280.8,1523.48 cw(c1280.8,1502.98) 1280.8,1482.48 1204.8,1482.48 ccw(c1204.8,1474.98) 1204.8,1467.48 1259.8,1467.48 cw(c1259.8,1446.98) 1280.3,1446.98 1280.3,1332 ccw(c1314.07,1332) 1290.19,1308.12 1347.2,1251.11 ccw(c1358,1261.92) 1357.99,1246.64 1363,1246.64 ccw(c1363,1251.64) 1366.53,1248.1 v1(1378.26,1259.83)
A6_T7N_B8: J3.29 P1.A6 | length 1271
  TOP w5: P1.A6@1437.31,1240.15 1436.97,1240.5 cw(c1455.47,1259.01) 1429.3,1259 1429.3,1290.21 cw(c1436.8,1290.21) 1436.8,1297.71 1440.8,1297.71 ccw(c1440.8,1305.21) 1440.8,1312.71 1436.8,1312.71 cw(c1436.8,1320.21) 1429.3,1320.21 1429.3,1357 cw(c1436.8,1357) 1436.8,1364.5 1457.8,1364.5 ccw(c1457.8,1385) 1457.8,1405.5 1436.8,1405.5 cw(c1436.8,1413) 1436.8,1420.5 1457.8,1420.5 ccw(c1457.8,1441) 1457.8,1461.5 1436.8,1461.5 cw(c1436.8,1469) 1436.8,1476.5 1457.8,1476.5 ccw(c1457.8,1497) 1457.8,1517.5 1436.8,1517.5 cw(c1436.8,1525) 1436.8,1532.5 1457.8,1532.5 ccw(c1457.8,1553) 1457.8,1573.5 1436.8,1573.5 cw(c1436.8,1581) 1429.3,1581 1429.3,1591 cw(c1442.3,1591) 1442.3,1604 1649.46,1604 ccw(c1649.46,1629) 1649.46,1654 1550.3,1654 cw(c1550.3,1663) 1541.3,1663 1541.3,1733.38 ccw(c1523.3,1733.38) 1523.3,1751.38 1490.73,1751.38 cw(c1490.73,1756.38) 1485.73,1756.38 J3.29@1485.73,1794.88
A7_T9N_B8: J3.35 P1.A7 | length 1229.1
  TOP w5.78: v1(1457,1259.83) P1.A7@1476.68,1240.15
  BOTTOM w5: v1(1457,1259.83) cw(c1497.32,1300.15) 1440.3,1300.15 1440.3,1318.52 cw(c1444.3,1318.52) 1444.3,1322.52 ccw(c1444.3,1326.52) 1448.3,1326.52 1448.3,1333.52 ccw(c1444.3,1333.52) 1444.3,1337.52 cw(c1444.3,1341.52) 1440.3,1341.52 1440.3,1462.59 cw(c1447.8,1462.59) 1447.8,1470.09 ccw(c1447.8,1490.2) 1467.91,1490.2 1467.91,1490.98 ccw(c1447.8,1490.98) 1447.8,1511.09 1439.55,1511.09 cw(c1439.55,1518.59) 1439.55,1526.09 1447.8,1526.09 ccw(c1447.8,1546.2) 1467.91,1546.2 1467.91,1546.98 ccw(c1447.8,1546.98) 1447.8,1567.09 cw(c1447.8,1574.59) 1440.3,1574.59 1440.3,1615.78 cw(c1451.94,1615.77) 1443.72,1624.01 1460.3,1640.59 cw(c1468.51,1632.4) 1468.5,1644 1719.3,1644 ccw(c1719.3,1662) 1737.3,1662 1737.3,1828.17 cw(c1742.3,1828.17) 1742.3,1833.17 1828.3,1833.17 cw(c1828.3,1828.17) 1833.3,1828.17 1833.3,1756.38 cw(c1828.3,1756.38) 1828.3,1751.38 1790.73,1751.38 cw(c1790.73,1756.38) 1785.73,1756.38 J3.35@1785.73,1794.88
A8_T11N_CLK4N_B8: J3.31 P1.A8 | length 1284.2
  TOP w5: P1.A8@1516.05,1240.15 1511.91,1244.3 cw(c1520.61,1253.01) 1508.3,1253 1508.3,1284.59 cw(c1515.8,1284.59) 1515.8,1292.09 1517.8,1292.09 ccw(c1517.8,1299.59) 1517.8,1307.09 1515.8,1307.09 cw(c1515.8,1314.59) 1508.3,1314.59 1508.3,1466.49 cw(c1515.8,1466.49) 1515.8,1473.99 1587.92,1473.99 ccw(c1587.92,1494.49) 1587.92,1514.99 1515.8,1514.99 cw(c1515.8,1522.49) 1508.3,1522.49 1508.3,1538 cw(c1527.3,1538) 1527.3,1557 1653.94,1557 ccw(c1653.94,1606.15) 1688.69,1571.39 1731.59,1614.28 ccw(c1696.13,1649.77) 1746.3,1649.77 1746.3,1836 ccw(c1728.3,1836) 1728.3,1854 1648.3,1854 ccw(c1648.3,1836) 1630.3,1836 1630.3,1756.38 cw(c1625.3,1756.38) 1625.3,1751.38 1590.73,1751.38 cw(c1590.73,1756.38) 1585.73,1756.38 J3.31@1585.73,1794.88
A9_CLK8_B7: J3.43 P1.A9 | length 1318.3
  TOP w5.78: P1.A9@1555.43,1240.15 1555.43,1258.45 cw(c1564.1,1258.45) 1564.1,1267.12 1571.63,1267.12 ccw(c1571.63,1275.79) 1571.63,1284.46 1564.1,1284.46 cw(c1564.1,1293.13) 1564.1,1301.8 1571.63,1301.8 ccw(c1571.63,1310.47) 1571.63,1319.14 1564.1,1319.14 cw(c1564.1,1327.81) 1555.43,1327.81 1555.43,1356.81 cw(c1590,1356.81) 1565.56,1381.26 1799.3,1615 cw(c1818.61,1595.69) 1818.61,1623 2230.33,1623 ccw(c2230.33,1632.97) 2240.3,1632.97 2240.3,1726.42 ccw(c2230.63,1726.42) 2230.63,1736.09 2184.94,1736.09 cw(c2184.94,1744.76) 2184.94,1753.43 2230.63,1753.43 ccw(c2230.63,1763.1) 2240.3,1763.1 2240.3,1787 ccw(c2232.42,1787) 2232.42,1794.88 J3.43@2185.73,1794.88
A10_T16N_B7: J3.49 P1.A10 | length 1318.8
  TOP w5: P1.A10@1594.8,1240.15 1598.1,1243.46 ccw(c1585.58,1256) 1603.3,1256 1603.3,1291.47 ccw(c1598.3,1291.47) 1598.3,1296.47 cw(c1598.3,1301.47) 1593.3,1301.47 1593.3,1306.47 cw(c1598.3,1306.47) 1598.3,1311.47 ccw(c1598.3,1316.47) 1603.3,1316.47 1603.3,1321.47 ccw(c1598.3,1321.47) 1598.3,1326.47 cw(c1598.3,1331.47) 1593.3,1331.47 1593.3,1336.47 cw(c1598.3,1336.47) 1598.3,1341.47 ccw(c1598.3,1346.47) 1603.3,1346.47 1603.3,1361 cw(c1644.33,1361.01) 1614.78,1389.48 1615.32,1390.02 1799.09,1573.8 cw(c1850.29,1522.58) 1850.3,1595 2424.3,1595 ccw(c2424.3,1600) 2429.3,1600 2429.3,1733.38 cw(c2447.3,1733.38) 2447.3,1751.38 2480.73,1751.38 ccw(c2480.73,1756.38) 2485.73,1756.38 J3.49@2485.73,1794.88
A11_T20N_B7: J3.51 P1.A11 | length 1382.6
  TOP w5: P1.A11@1634.17,1240.15 ccw(c1616.96,1257.36) 1641.3,1257.36 1641.3,1267.95 ccw(c1636.8,1267.95) 1636.8,1272.45 cw(c1636.8,1276.95) 1632.3,1276.95 1632.3,1282.95 cw(c1636.8,1282.95) 1636.8,1287.45 ccw(c1636.8,1291.95) 1641.3,1291.95 1641.3,1297.95 ccw(c1636.8,1297.95) 1636.8,1302.45 cw(c1636.8,1306.95) 1632.3,1306.95 1632.3,1312.95 cw(c1636.8,1312.95) 1636.8,1317.45 ccw(c1636.8,1321.95) 1641.3,1321.95 1641.3,1330 cw(c1675.1,1330) 1651.2,1353.9 1834.97,1537.67 cw(c1875.29,1496.07) 1875.3,1554 2523.3,1554 ccw(c2523.3,1559) 2528.3,1559 2528.3,1733.38 cw(c2546.3,1733.38) 2546.3,1751.38 2580.73,1751.38 ccw(c2580.73,1756.38) 2585.73,1756.38 J3.51@2585.73,1794.88
A12_T21N_B7: J3.53 P1.A12 | length 1409.2
  TOP w5: P1.A12@1673.54,1240.15 1676.29,1242.89 ccw(c1664.18,1254.99) 1681.3,1255 1681.3,1289 cw(c1711.2,1289.01) 1690.05,1310.15 1706.1,1326.2 ccw(c1696,1336.33) 1710.3,1336.32 1710.3,1345 cw(c1774,1345.01) 1728.95,1390.05 1827.1,1488.2 1834.78,1495.89 cw(c1871.28,1459.36) 1871.3,1511 1905.86,1511 ccw(c1905.86,1518.5) 1913.36,1518.5 1913.36,1520.5 cw(c1920.86,1520.5) 1928.36,1520.5 1928.36,1518.5 ccw(c1935.86,1518.5) 1935.86,1511 2517.3,1511 ccw(c2517.3,1567.98) 2557.59,1527.69 2616.56,1586.66 ccw(c2588.22,1615) 2628.3,1615 2628.3,1727 cw(c2652.68,1727) 2652.68,1751.38 2680.73,1751.38 ccw(c2680.73,1756.38) 2685.73,1756.38 J3.53@2685.73,1794.88
A13_T22N_VREF_B7: J3.55 P1.A13 | length 1438
  TOP w5: P1.A13@1712.91,1240.15 ccw(c1695.07,1257.99) 1720.3,1257.99 1720.3,1277 cw(c1747.79,1277.01) 1728.35,1296.45 1736.6,1304.7 ccw(c1725.29,1316.03) 1741.3,1316.03 1741.3,1340.01 cw(c1766.37,1340) 1748.64,1357.73 1768.49,1377.58 ccw(c1765.34,1380.73) 1768.48,1383.88 cw(c1771.62,1387.02) 1768.48,1390.16 1772.81,1394.49 cw(c1775.95,1391.34) 1779.09,1394.49 ccw(c1782.24,1397.63) 1785.39,1394.49 1789.7,1398.8 ccw(c1786.56,1401.95) 1789.7,1405.1 cw(c1792.84,1408.24) 1789.7,1411.38 1794.03,1415.71 cw(c1797.17,1412.56) 1800.31,1415.71 ccw(c1803.46,1418.85) 1806.61,1415.71 1844.79,1453.89 cw(c1881.29,1417.36) 1881.29,1469 2531.3,1469 ccw(c2531.3,1533.22) 2576.71,1487.81 2714.44,1625.54 ccw(c2680.98,1659) 2728.3,1659 2728.3,1726.38 cw(c2753.3,1726.38) 2753.3,1751.38 2780.73,1751.38 ccw(c2780.73,1756.38) 2785.73,1756.38 J3.55@2785.73,1794.88
ASDO: P1.C1 U1.5 | length 657.5
  TOP w5.78: v1(798.96,1390.39) U1.5@840.52,1390.39 ; v1(1220.78,1141.73) P1.C1@1240.46,1161.41
  BOTTOM w5.78: v1(798.96,1390.39) 801.37,1387.99 ccw(c830.31,1416.92) 830.3,1376 1079.72,1376 cw(c1079.72,1309.42) 1126.8,1356.5 1178.3,1305 cw(c1156.57,1283.27) 1187.3,1283.27 1187.3,1189.49 ccw(c1221.78,1189.49) 1197.4,1165.11 v1(1220.78,1141.73)
B1_IO_B1: J3.21 P1.B1 | length 1324.2
  TOP w5.78: J3.21@1085.73,1794.88 1135.3,1794.88 ccw(c1135.3,1804.88) 1145.3,1804.88 1145.3,1844 ccw(c1135.3,1844) 1135.3,1854 1113.53,1854 ccw(c1113.53,1845.33) 1104.86,1845.33 1104.86,1842.67 cw(c1096.19,1842.67) 1087.52,1842.67 1087.52,1845.33 ccw(c1078.85,1845.33) 1070.18,1845.33 1070.18,1842.67 cw(c1061.51,1842.67) 1052.84,1842.67 1052.84,1845.33 ccw(c1044.17,1845.33) 1044.17,1854 1036.3,1854 ccw(c1036.3,1844) 1026.3,1844 1026.3,1763.26 ccw(c1034.97,1763.26) 1034.97,1754.59 1105.67,1754.59 cw(c1105.67,1745.92) 1105.67,1737.25 1034.97,1737.25 ccw(c1034.97,1728.58) 1026.3,1728.58 1026.3,1659.93 cw(c1017.63,1659.93) 1017.63,1651.26 996.89,1651.26 ccw(c996.89,1642.59) 996.89,1633.92 1017.63,1633.92 cw(c1017.63,1625.25) 1026.3,1625.25 1026.3,1613 ccw(c1045.61,1613.01) 1031.96,1599.35 1032.8,1598.5 1178.35,1452.95 ccw(c1184.48,1459.08) 1190.61,1452.95 1205.35,1467.69 ; 1205.34,1467.7 cw(c1211.48,1461.56) 1217.62,1455.42 1202.88,1440.68 ccw(c1209.01,1434.55) 1202.88,1428.42 1216.8,1414.5 cw(c1203.52,1401.22) 1222.3,1401.22 1222.3,1296.59 ccw(c1230.97,1296.59) 1230.97,1287.92 1233.9,1287.92 cw(c1233.9,1279.25) 1233.9,1270.58 1230.97,1270.58 ccw(c1230.97,1261.91) 1222.3,1261.91 1222.3,1226.68 ccw(c1240.98,1226.68) 1227.77,1213.47 P1.B1@1240.46,1200.78
B3_IO_B8: J3.22 P1.B3 | length 1297.2
  TOP w5.78: v1(1299.52,1220.46) P1.B3@1319.2,1200.78
  BOTTOM w5.78: J3.22@1085.73,1694.88 1085.73,1653.24 ccw(c1094.4,1653.24) 1094.4,1644.57 1158.63,1644.57 cw(c1158.63,1635.9) 1158.63,1627.23 1050.4,1627.23 ccw(c1050.4,1618.56) 1050.4,1609.89 1158.63,1609.89 cw(c1158.63,1601.22) 1158.63,1592.55 1050.4,1592.55 ccw(c1050.4,1583.88) 1050.4,1575.21 1158.63,1575.21 cw(c1158.63,1566.54) 1158.63,1557.87 1094.4,1557.87 ccw(c1094.4,1549.2) 1085.73,1549.2 1085.73,1536.42 ccw(c1104.71,1536.42) 1091.29,1523 1104.21,1510.08 ccw(c1110.34,1516.21) 1116.47,1510.08 1140.77,1534.38 cw(c1146.91,1528.24) 1153.05,1522.1 ; 1153.04,1522.11 1128.74,1497.81 ccw(c1137.87,1488.68) 1128.74,1479.55 1246.29,1362 cw(c1236.61,1352.32) 1250.3,1352.32 1250.3,1313 ccw(c1272.03,1312.99) 1256.66,1297.63 1259.8,1294.5 1290.8,1263.5 cw(c1269.75,1242.45) 1299.52,1242.45 v1(1299.52,1220.46)
B4_T3P_B8: J3.28 P1.B4 | length 1264.3
  TOP w5: P1.B4@1358.57,1200.78 cw(c1407.37,1249.66) 1338.3,1249.66 1338.3,1316.93 ccw(c1321.23,1316.93) 1333.3,1329 1297.21,1365.1 1281.81,1380.5 cw(c1300.71,1399.4) 1273.98,1399.41 1273.98,1403.25 1273.92,1412.94 cw(c1294.42,1413.08) 1294.28,1433.58 1304.05,1433.63 ccw(c1303.99,1441.44) 1311.8,1441.51 ccw(c1304.6,1441.45) 1304.55,1448.65 1294.19,1448.6 cw(c1294.05,1469.1) 1273.55,1468.96 1273.3,1510.92 cw(c1293.8,1510.97) 1273.3,1511.03 1273.3,1514.75 cw(c1290.05,1514.75) 1290.05,1531.5 1378.54,1531.5 ccw(c1378.54,1539) 1378.54,1546.5 1293.8,1546.5 cw(c1293.8,1567) 1293.8,1587.5 1378.54,1587.5 ccw(c1378.54,1595) 1378.54,1602.5 1291.3,1602.5 cw(c1291.3,1620.5) 1273.3,1620.5 1273.3,1637 cw(c1291.3,1637) 1291.3,1655 1429.3,1655 ccw(c1429.3,1660) 1434.3,1660 1434.3,1733.38 ccw(c1429.3,1733.38) 1429.3,1738.38 1390.73,1738.38 ccw(c1390.73,1733.38) 1385.73,1733.38 J3.28@1385.73,1694.88
B5_T5P_B8: J3.26 P1.B5 | length 1263.2
  TOP w5.78: v1(1378.26,1220.46) P1.B5@1397.94,1200.78
  BOTTOM w5: J3.26@1285.73,1694.88 1285.73,1733.38 cw(c1290.73,1733.38) 1290.73,1738.38 1327.3,1738.38 cw(c1327.3,1733.38) 1332.3,1733.38 1332.3,1652 cw(c1327.3,1652) 1327.3,1647 1202.3,1647 ccw(c1202.3,1629) 1184.3,1629 1184.3,1584.48 ccw(c1202.3,1584.48) 1202.3,1566.48 1280.8,1566.48 cw(c1280.8,1558.98) 1280.8,1551.48 1204.8,1551.48 ccw(c1204.8,1530.98) 1204.8,1510.48 1280.8,1510.48 cw(c1280.8,1502.98) 1280.8,1495.48 1204.8,1495.48 ccw(c1204.8,1474.98) 1204.8,1454.48 1259.8,1454.48 cw(c1259.8,1446.98) 1267.3,1446.98 1267.3,1332 ccw(c1314.08,1331.99) 1280.99,1298.92 1337.99,1241.92 ccw(c1357.98,1261.92) 1357.98,1233.64 1363.01,1233.64 cw(c1363.01,1228.64) 1366.54,1232.18 v1(1378.26,1220.46)
B6_T7P_B8: J3.30 P1.B6 | length 1270.1
  TOP w5: P1.B6@1437.31,1200.78 1425.19,1212.9 cw(c1446.65,1234.36) 1416.3,1234.36 1416.3,1357 cw(c1436.8,1357) 1436.8,1377.5 1457.8,1377.5 ccw(c1457.8,1385) 1457.8,1392.5 1436.8,1392.5 cw(c1436.8,1413) 1436.8,1433.5 1457.8,1433.5 ccw(c1457.8,1441) 1457.8,1448.5 1436.8,1448.5 cw(c1436.8,1469) 1436.8,1489.5 1457.8,1489.5 ccw(c1457.8,1497) 1457.8,1504.5 1436.8,1504.5 cw(c1436.8,1525) 1436.8,1545.5 1457.8,1545.5 ccw(c1457.8,1553) 1457.8,1560.5 1436.8,1560.5 cw(c1436.8,1581) 1416.3,1581 1416.3,1591 cw(c1442.3,1591) 1442.3,1617 1649.46,1617 ccw(c1649.46,1629) 1649.46,1641 1550.3,1641 cw(c1550.3,1663) 1528.3,1663 1528.3,1733.38 ccw(c1523.3,1733.38) 1523.3,1738.38 1490.73,1738.38 ccw(c1490.73,1733.38) 1485.73,1733.38 J3.30@1485.73,1694.88